# EAGLE board temp_control (EAGLE 6.2)
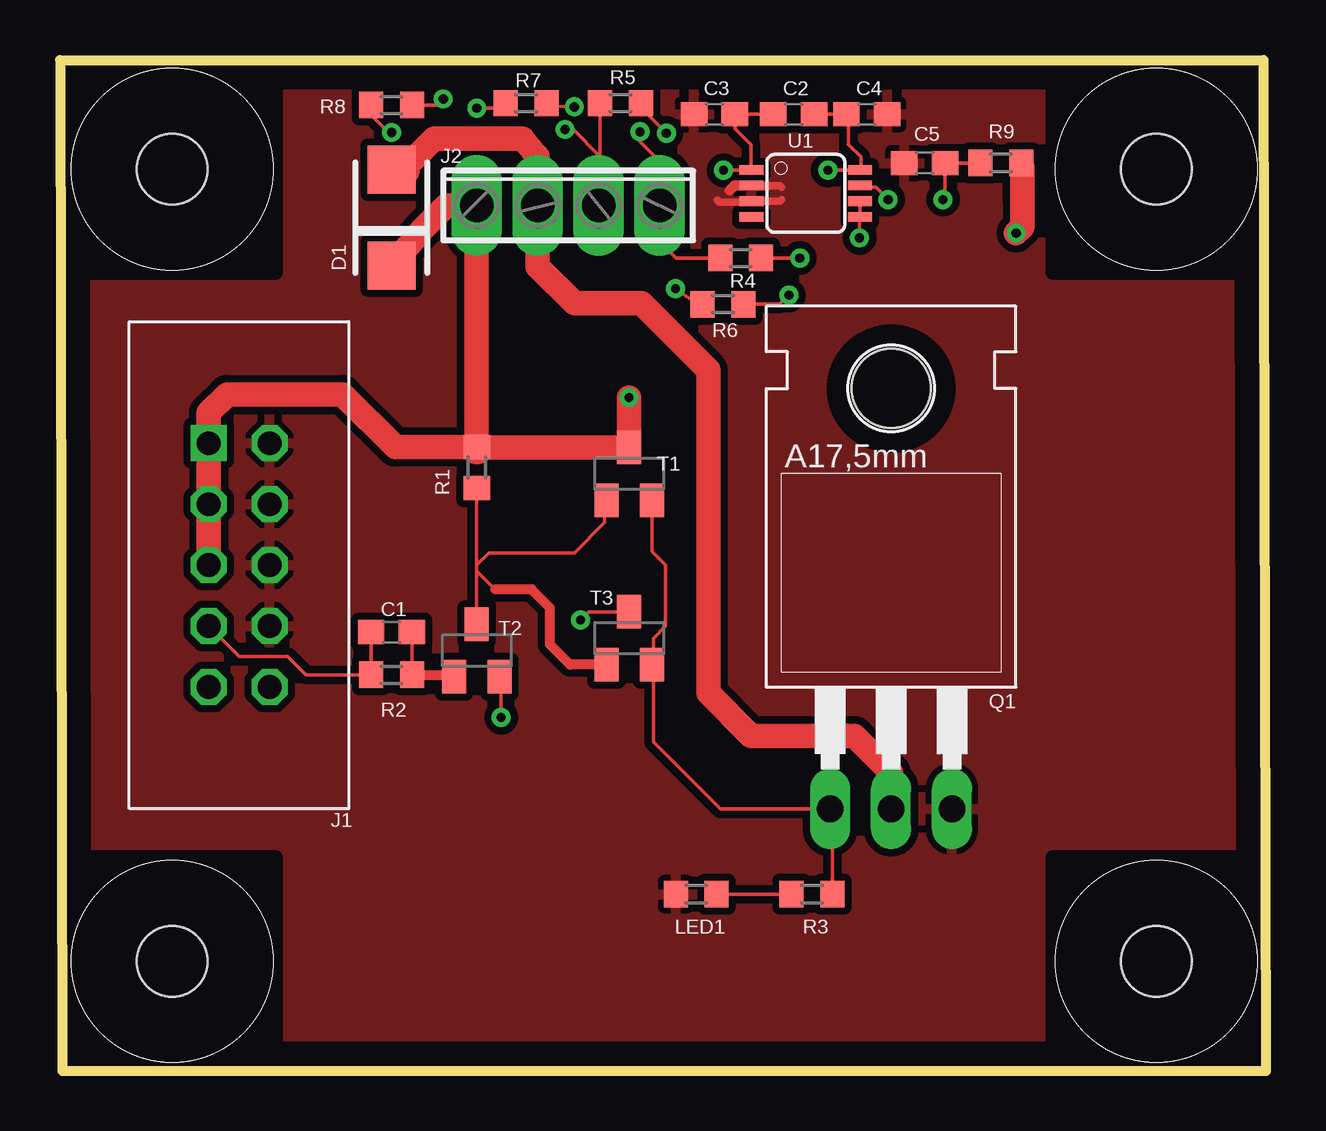
[diagram p0: board, top side]
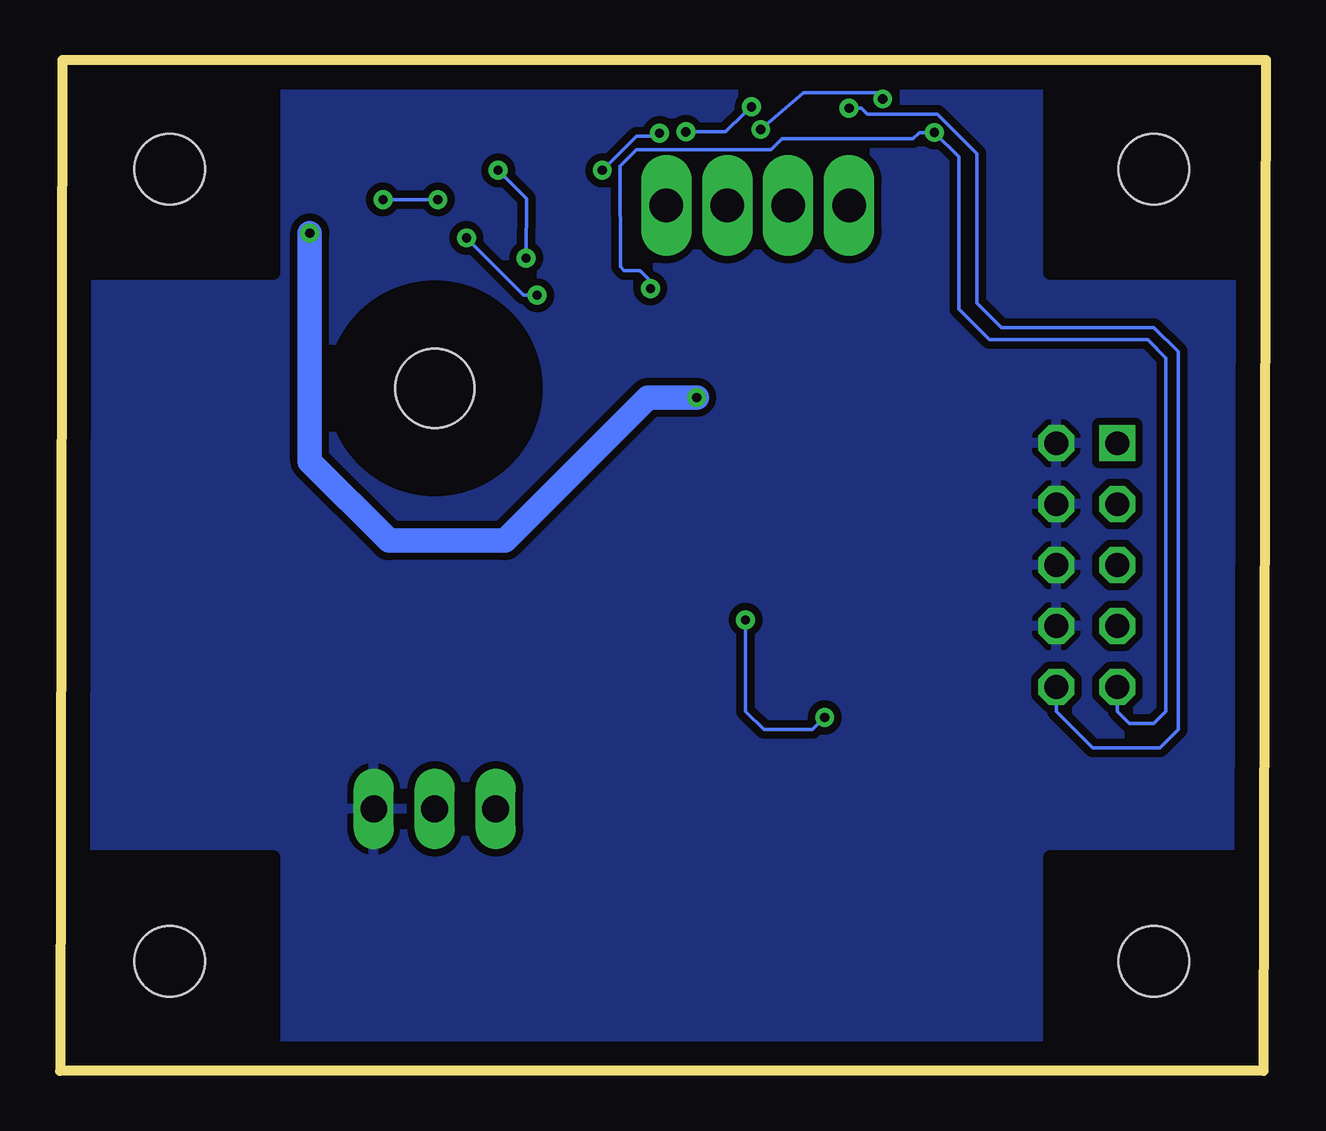
[diagram p1: board, bottom side, seen from below]

Size 50.27 x 42.14 mm. Coordinates in mm from the lower left corner, seen from the top.
Outline: 0,42.14 50.16,42.14 50.27,0 0.1,0 0,42.14
Copper layers (1*16): Top 0.035mm / dielectric 1.5mm / Bottom 0.035mm
Design rules: minimum track width 6mil, minimum drill 15mil, track to track 6mil, track to pad 6mil, pad to pad 6mil, via to via 6mil, smd to smd 6mil, copper to edge 40mil, drill to drill 8mil, minimum pad ring 10mil, minimum via ring 8mil, stop-mask expansion 4mil, vias tented up to drill 0mil, thermal gap 10mil
Holes 2.95 mm at 4.67,37.59 4.67,4.57 45.69,4.57 45.69,37.59
tRestrict: area 0.4,33.3 to 9,41.9; area 0.4,0.3 to 9,8.9; area 41.4,0.3 to 50,8.9; area 41.4,33.3 to 50,41.9
bRestrict: area 0.4,33.3 to 9,41.9; area 41.4,33.3 to 50,41.9; area 0.4,0.3 to 9,8.9; area 41.4,0.3 to 50,8.9

## Footprints (pad centres in the part's own frame; a part is rotated, then mirrored left to right if it is on the bottom)
C0603 = smd 1.1 x 1: 1 -0.85,0; 2 0.85,0
DISCRETE_SMA = smd 2 x 2: A 2,0; C -2,0
SBH11-PBPC-D05-ST-BK = drill 0.991 square: 1 0,0 | drill 0.991 octagon: 2 2.54,0; 3 0,-2.54; 4 2.54,-2.54; 5 0,-5.08; 6 2.54,-5.08; 7 0,-7.62; 8 2.54,-7.62; 9 0,-10.16; 10 2.54,-10.16
4POL254 = drill 1.4 long: 1 -3.81,0; 2 -1.27,0; 3 1.27,0; 4 3.81,0
R0603 = smd 1 x 1.1: 1 -0.85,0; 2 0.85,0
TO220 = drill 1.118 long: 1 -2.54,-6.35; 2 0,-6.35; 3 2.54,-6.35 | hole 3.302: 0,11.176
SOT23-BEC = smd 1 x 1.4: B -0.95,-1.1; C 0,1.1; E 0.95,-1.1
MSOP08 = smd 0.4 x 1: 1 -0.976,-2.263; 2 -0.326,-2.263; 3 0.324,-2.263; 4 0.974,-2.263; 5 0.974,2.262; 6 0.324,2.262; 7 -0.326,2.262; 8 -0.976,2.262

## Placement (x,y rotation side)
C1  0.1uF  [C0603]  13.82,18.29 180 top
C2  10uF  [C0603]  30.58,39.88 180 top
C3  1uF  [C0603]  27.28,39.88 180 top
C4  1uF  [C0603]  33.63,39.88 180 top
C5  0.1uF  [C0603]  36.04,37.85 180 top
D1  B340A-13-F  [DISCRETE_SMA]  13.82,35.56 90 top
J1  SBH11-PBPC-D05-ST-BK  [SBH11-PBPC-D05-ST-BK]  6.2,26.16 0 top
J2  OSTVN04A150  [4POL254]  21.18,36.07 0 top
LED1  RED  [R0603]  26.52,7.37 0 top
Q1  IRL640A  [TO220]  34.65,17.27 0 top
R1  8.2k  [R0603]  17.37,25.15 90 top
R2  4.7k  [R0603]  13.82,16.51 180 top
R3  3.9k  [R0603]  31.34,7.37 0 top
R4  10k  [R0603]  28.37,33.88 180 top
R5  10k  [R0603]  23.37,40.34 180 top
R6  0  [R0603]  27.64,31.95 180 top
R7  0  [R0603]  19.43,40.34 180 top
R8  0  [R0603]  13.82,40.26 180 top
R9  10  [R0603]  39.22,37.85 0 top
T1  MMBT2222A  [SOT23-BEC]  23.72,24.89 0 top
T2  MMBT2222A  [SOT23-BEC]  17.37,17.53 0 top
T3  MMBT3906LT1  [SOT23-BEC]  23.72,18.03 0 top
U1  AD8495  [MSOP08]  31.09,36.58 270 top

## Library data of the parts
C1-C5 LED1 R1-R9 = resistor
D1 = chipKIT_Max32
J1 = SBH11-PBPC-D05-ST-BK
J2 = con-OST-254
Q1 = transistor-fet
T1-T3 = transistor
U1 = analog-devices

## Nets
CTRL: C1.2 J1.7 R2.2
GND: C3.2 C4.1 C5.2 J1.2 J1.4 J1.6 J1.8 LED1.1 Q1.3 U1.2 U1.3
HEAT0: D1.A J2.2 Q1.2
N$1: LED1.2 R3.1
N$2: C2.2 C3.1 R5.1 U1.1
N$3: C1.1 R2.1 T2.B
N$4: R1.1 T1.B T2.C T3.B
N$5: C2.1 C4.2 R4.1 U1.8
N$6: Q1.1 R3.2 T1.E T3.E
N$7: C5.1 R9.1 U1.7
N$8: T2.E T3.C
N$12: R6.1 U1.5 U1.6
OUT1: J2.3 R5.2 R8.1
OUT2: J2.4 R4.2 R7.1
THERM1: J1.9 R6.2 R8.2
THERM2: J1.10 R7.2
VCC: D1.C J1.1 J1.3 J1.5 J2.1 R1.2 R9.2 T1.C

## Tracks (layer width: path | path; a pad name or v marks a point on that pad's centre or on a via)
CTRL
  Top 0.152: J1.7 7.47,17.27 9.5,17.27 10.26,16.51 R2.2 C1.2
GND
  Top 0.305: U1.2 30,36.9 30.07,36.83 | 30.07,36.32 30,36.25 U1.3 28.83,36.3 28.8,36.32 28.8,36.25 28.78,36.22 27.48,36.22 27.41,36.3
  Top 0.406: U1.2 28.11,36.9 27.91,36.7
  pour Top (isolate 0.305): 0.61,41.66 49.76,41.66 49.76,0.51 0.36,0.25 0.36,41.15
  pour Bottom (isolate 0.305): 0.61,41.66 49.76,41.66 49.76,0.51 0.61,0.51
HEAT0
  Top 1.016: Q1.2 34.65,12.45 33.12,13.97 28.8,13.97 27.03,15.75 27.03,29.21 24.23,32 21.44,32 19.91,33.53 J2.2 19.91,38.1 19.28,38.86 15.6,38.86 14.29,37.56
  Top 1.422: D1.A 14.29,37.56
N$1
  Top 0.152: R3.1 LED1.2
N$2  (via drill 0.38)
  Top 0.152: C2.2 C3.1 28.13,39.28 28.8,38.61 28.8,37.58 U1.1 28.82,37.54 v27.66,37.54 | R5.1 24.54,39.83 v25.27,39.09
  Bottom 0.152: v25.27,39.09 25.27,39.07 25.37,38.96 26.24,38.96 v27.66,37.54
N$3
  Top 0.152: R2.1 C1.1
  Top 0.406: R2.1 16.36,16.51 | 16.36,16.51 16.61,16.51 | T2.B 16.36,16.43 16.36,16.51
N$4
  Top 0.152: T2.C 17.37,20.83 | 17.37,20.83 17.37,21.08 | 17.37,21.08 R1.1 | 22.71,23.62 22.71,22.86 21.44,21.59 17.88,21.59 17.37,21.08 | 18.14,20.07 17.37,20.83
  Top 0.406: T1.B 22.77,23.69 22.71,23.62 | T3.B 21.27,16.93 20.42,17.78 20.42,19.3 19.66,20.07 18.14,20.07
N$5  (via drill 0.38)
  Top 0.152: C2.1 C4.2 32.87,39.88 32.87,38.61 33.38,38.1 33.38,37.58 U1.8 33.34,37.54 v32,37.54 | R4.1 v30.84,33.88
  Bottom 0.152: v30.84,33.88 30.81,36.35 v32,37.54
N$6
  Top 0.152: T1.E 24.67,21.66 25.25,21.08 25.25,18.54 24.74,18.03 24.74,17 24.74,13.72 27.53,10.92 Q1.1 32.19,10.92 R3.2
  Top 0.406: 24.74,17 T3.E
N$7  (via drill 0.38)
  Top 0.152: R9.1 C5.1 36.89,36.41 v36.8,36.32 | v34.52,36.32 34.01,36.83 33.42,36.83 U1.7
  Bottom 0.152: v36.8,36.32 v34.52,36.32
N$8  (via drill 0.38)
  Top 0.152: T3.C 22.03,19.13 v21.69,18.8 | v18.39,14.73 18.39,16.36
  Top 0.406: 18.39,16.36 T2.E
  Bottom 0.152: v21.69,18.8 21.69,14.99 20.93,14.22 18.9,14.22 v18.39,14.73
N$12  (via drill 0.38)
  Top 0.152: R6.1 30,31.95 v30.38,32.33 | v33.32,34.72 33.32,35.58 | U1.5 U1.6
  Top 0.305: 33.32,35.58 U1.5
  Bottom 0.152: v30.38,32.33 30.94,32.33 v33.32,34.72
OUT1  (via drill 0.38)
  Top 0.152: R5.2 22.52,38.1 | 22.52,38.1 22.52,36.13 J2.3 | R8.1 15.72,40.26 v15.98,40.51 | v21.06,39.24 21.37,39.24 22.52,38.1
  Bottom 0.152: v15.98,40.51 16.23,40.77 19.28,40.77 v21.06,39.24
OUT2  (via drill 0.38)
  Top 0.152: R4.2 25.68,33.88 24.99,34.57 J2.4 24.99,37.92 24.18,38.73 v24.18,39.14 | R7.1 20.52,40.21 v21.44,40.18
  Bottom 0.152: v21.44,40.18 21.74,39.93 22.53,39.14 v24.18,39.14
THERM1  (via drill 0.38)
  Top 0.152: R6.2 26.57,31.95 v25.65,32.61 | v13.82,39.12 13.69,39.12 12.93,39.88 12.93,40.47 R8.2
  Bottom 0.152: J1.9 6.2,14.99 5.69,14.48 4.67,14.48 4.17,14.99 4.17,29.72 4.93,30.48 11.53,30.48 12.8,31.75 12.8,38.1 v13.82,39.12 14.45,39.12 14.71,38.86 20.17,38.86 20.62,38.41 26.24,38.41 26.92,37.72 26.9,33.53 26.75,33.35 26.09,33.35 25.65,32.92 v25.65,32.61
THERM2  (via drill 0.38)
  Top 0.152: v17.37,40.13 18.26,40.13 R7.2
  Bottom 0.152: J1.10 8.74,14.99 7.21,13.46 4.42,13.46 3.66,14.22 3.66,29.97 4.67,30.99 11.02,30.99 12.04,32 12.04,38.23 13.69,39.88 16.61,39.88 16.87,40.13 v17.37,40.13
VCC  (via drill 0.38)
  Top 0.813: 40.11,37.68 R9.2
  Top 1.016: R1.2 T1.C v23.72,28.07 | J1.5 J1.3 J1.1 6.2,27.43 6.96,28.19 11.79,28.19 13.98,26 R1.2 J2.1 16.1,36.07 15.12,35.08 D1.C | 40.11,37.68 40.11,36.32 40.11,35.18 v39.85,34.93
  Top 1.422: R1.2
  Bottom 1.016: v23.72,28.07 25.76,28.07 31.72,22.1 36.55,22.1 39.85,25.4 v39.85,34.93